# Altium PCB foc.PcbDoc
Units mm, origin at the board's own origin, x right, y up, seen from the top; angles counter-clockwise.
Board outline 68.05 x 53.25 mm, 2 copper layers (Top Layer, Bottom Layer), stack 1.671 mm thick; 34 components, 40 nets, 128 pads, 27 vias.
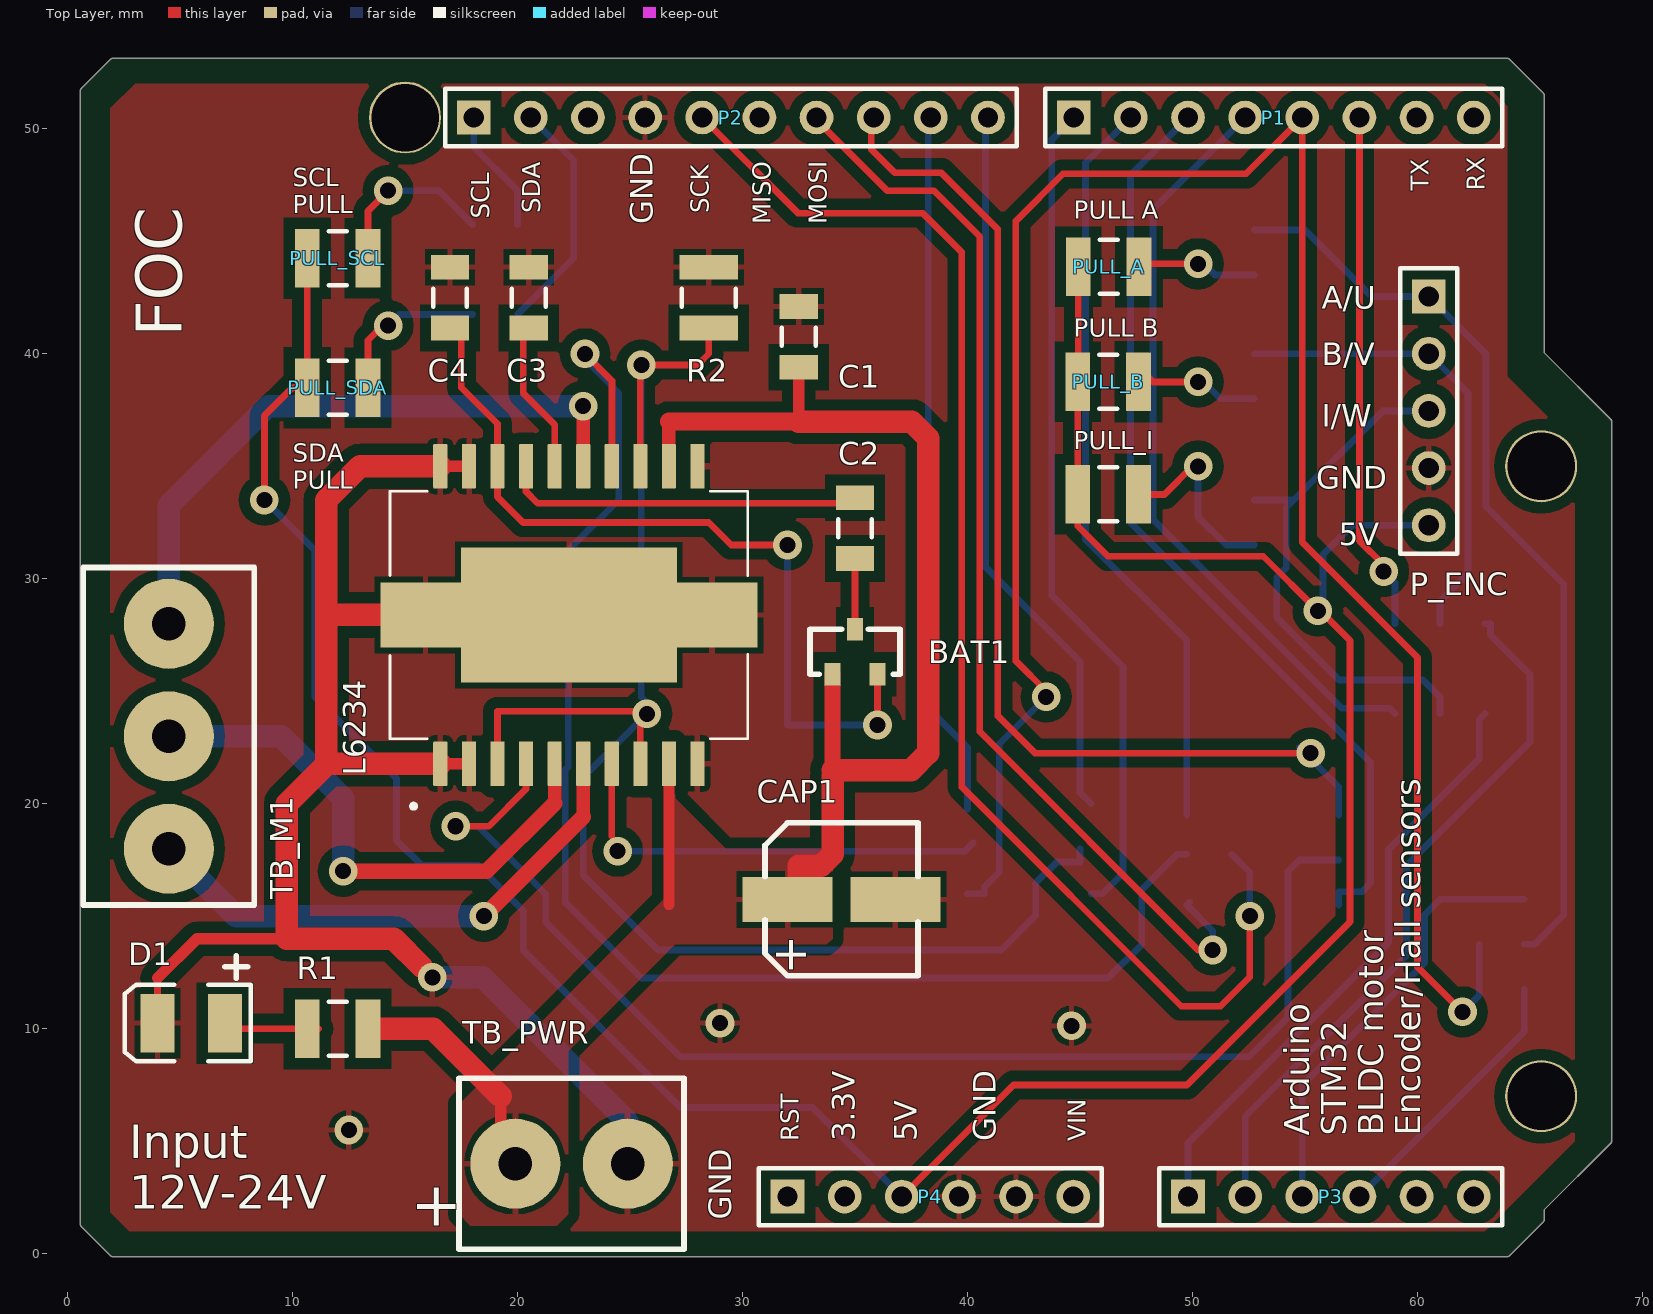
[diagram p0: Top Layer view]
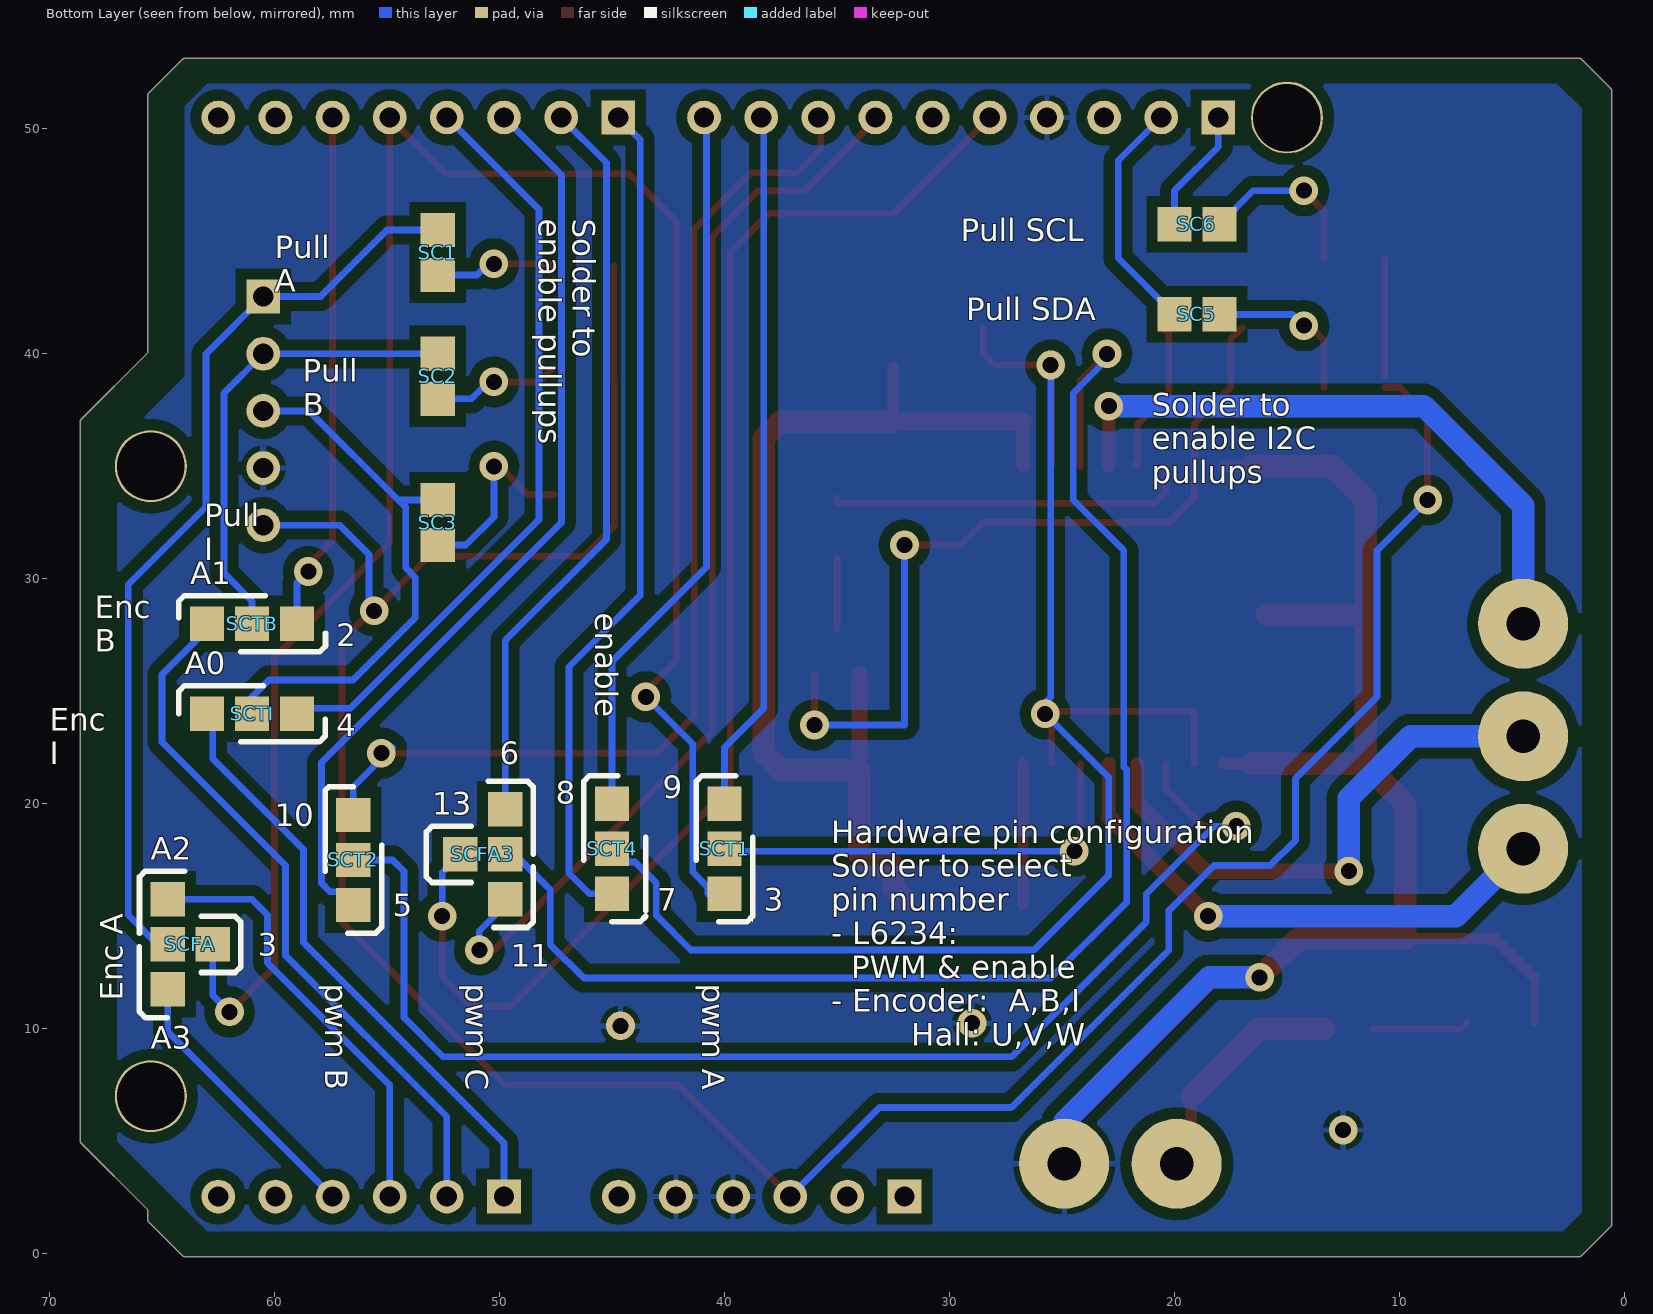
[diagram p1: Bottom Layer view, seen from below]

## Layer stack, top to bottom
Top Solder: solder mask 0.0102, Solder Resist, Dk 3.5
Top Layer: signal copper 0.0356
Dielectric 1: dielectric 1.6, FR-4, Dk 4.8
Bottom Layer: signal copper 0.0356
Bottom Solder: solder mask 0.0102, Solder Resist, Dk 3.5

## Board outline
0.785,1.035 cw(c0.875,1.125) 0.784,1.035 0.61,1.21 1.91,-0.09 ccw(c2,0) 2,-0.127 64,-0.127 ccw(c64,0) 64.09,-0.09 65.59,1.41 ccw(c65.5,1.5) 65.627,1.5 65.627,1.947 68.59,4.91 68.59,4.909 ccw(c68.5,5) 68.627,5 68.627,37 ccw(c68.5,37) 68.59,37.091 68.59,37.09 65.627,40.053 65.627,51.5 ccw(c65.5,51.5) 65.59,51.59 64.09,53.09 ccw(c64,53) 64,53.127 2,53.127 ccw(c2,53) 1.909,53.089 1.91,53.09 0.61,51.79 ccw(c0.7,51.7) 0.573,51.7 0.573,1.3 ccw(c0.7,1.3)

## Design rules (kind name [scope] priority, off if disabled: settings)
Clearance [All] p1: gap=0.5 ignorepadtopadclearanceinfootprint=FALSE except(0.2: SMDPad-SMDPad)
PolygonConnect [All] p1: connectstyle=Relief reliefconductorwidth=0.254 reliefentries=4 polygonreliefangle="90 Angle" airgapwidth=0.254
RoutingVias [All] p1: holewidth=0.711 width=1.27 viastyle="Through Hole" minholewidth=0.711 minwidth=1.27 maxholewidth=0.711 maxwidth=1.27
SolderMaskExpansion [All] p1: expansion=0.102
Width Mot_line [InNetClass('Mot')] p1: maxlimit=1 minlimit=0.5 preferedwidth=0.5
Width PWR_line [InNet('VCC')] p2: maxlimit=1 minlimit=0.5 preferedwidth=0.5
Width GND_line [InNet('GND')] p3: maxlimit=1 minlimit=0.3 preferedwidth=0.5 minimp=50.000000 maximp=50.000000 favimp=50.000000
Width [All] p4: maxlimit=0.3 minlimit=0.3 preferedwidth=0.3
30 further rules are at their usual default settings.

## Classes and differential pairs
net class Mot: NetL6234_5 NetL6234_6 NetL6234_15

## Components (designator, comment, footprint, x,y, rotation, side; value= is the part's Value field where it differs from the comment)
BAT1 "BAT54S" BAT54s 36,25.75 r180 top
C1 "Cap Semi" C1206 32.5,40.75 r90 top value=10nF
C2 "Cap Semi" C1206 35,32.25 r90 top value=10uF
C3 "Cap Semi" C1206 20.5,42.5 r90 top value=1uF
C4 "Cap Semi" C1206 17,42.5 r270 top value=220nF
CAP1 "EEH-ZA1E101XP" EEH-ZA1E101XP 37.8,19.15 r270 top
D1 "LED3" 3.5X2.8X1.9 5.5,10.25 r180 top
L6234 "L6234PD013TR" SOIC127P1420X360-21N 22.285,28.39 r90 top
P1 "Header 8" HDR1X8 44.72,50.5 r0 top locked
P2 "Header 10" HDR1X10 18.05,50.5 r0 top
P3 "Header 6" HDR1X6 49.8,2.54 r0 top locked
P4 "Header 6" HDR1X6 32,2.54 r0 top locked
P_ENC "Header 5" HDR1X5 60.5,42.54 r270 top
PULL_A "Res3" 14-1210 46.277,43.877 r0 top value=3.3k
PULL_B "Res3" 14-1210 46.25,38.75 r0 top value=3.3k
PULL_I "Res3" 14-1210 46.25,33.75 r0 top value=3.3k
PULL_SCL "Res3" 14-1210 12,44.25 r0 top value=4.7K
PULL_SDA "Res3" 14-1210 12,38.5 r0 top value=4.7K
R1 "Res3" 14-1210 12,10 r0 top value=620Ohm
R2 "Res3" 14-1210 28.5,42.5 r270 top value=4.7K
SC1 "solder_connection" solder_connection 52.75,45.5 r270 bottom
SC2 "solder_connection" solder_connection 52.75,40 r270 bottom
SC3 "solder_connection" solder_connection 52.75,33.5 r270 bottom
SC5 "solder_connection" solder_connection 20,41.75 r180 bottom
SC6 "solder_connection" solder_connection 20,45.75 r180 bottom
SCFA "solder_connection_four" solder_connection_four 64.75,13.75 r90 bottom
SCFA3 "solder_connection_four" solder_connection_four 49.75,17.75 r270 bottom
SCT1 "solder_connection_tripple" solder_connection_tripple 40,18 r270 bottom
SCT2 "solder_connection_tripple" solder_connection_tripple 56.5,17.5 r270 bottom
SCT4 "solder_connection_tripple" solder_connection_tripple 45,18 r270 bottom
SCTB "solder_connection_tripple" solder_connection_tripple 61,28 r180 bottom
SCTI "solder_connection_tripple" solder_connection_tripple 61,24 r180 bottom
TB_M1 "TB002-500-03BE" TB002-500-03BE 4.5,18 r90 top
TB_PWR "TB002-500-02BE" TB002-500-02BE 24.9,4 r180 top

## Footprints (in the part's own frame and the unit in brackets; to place one, negate y for a bottom-side part, rotate by r counter-clockwise, add the part's x,y. Pads: shape width x height; smd on the part's side, far side on the other; paste and mask are expansions set on the pad)
3.5X2.8X1.9 [mm] "SM LED; 2 C-Bend Leads; Body 3.5 x 2.8 x 1.9 mm, inc leads (LxWxH typ)"
  rect 1.5x2.6 smd: 1(-1.5,0) 2(1.5,0)
  silkscreen extent -2.65,-1.7 2.95,1.7
14-1210 [mm] "Chip Resistor, Body 3.2x2.5mm, IPC High Density"
  rect 1.1x2.6 smd: 1(-1.35,0) 2(1.35,0)
  silkscreen extent -0.4,-1.2 0.4,1.2, body extent -1.68,-1.32 1.68,1.32, height 0.9
BAT54s [mm]
  rect 0.7x1 smd: 1(2,0) 2(0,0) 3(1,-2)
  silkscreen extent -1,-2 3,0, body extent -0.46,-2.17 2.46,0.17, height 1
C1206 [mm] "Chip Capacitor, Body 3.2x1.6mm, IPC High Density"
  rect 1.1x1.7 smd: 1(-1.35,0) 2(1.35,0)
  silkscreen extent -0.4,-0.75 0.4,0.75, body extent -1.7,-0.9 1.7,0.9, height 1.3
EEH-ZA1E101XP [mm]
  rect 2x4 smd: 1(3.4,-1) 2(3.4,-5.8)
  silkscreen extent 0,-6.8 6.8,0, body extent 0.2,-7 6.8,0.3, height 7.7
HDR1X5 [mm] "Connector; Header; 5 Position"
  rect 1.5x1.5 hole 0.9: 1(0,0)
  round 1.5 hole 0.9: 2(2.54,0) 3(5.08,0) 4(7.62,0) 5(10.16,0)
  silkscreen extent -1.27,-1.27 11.43,1.27
HDR1X6 [mm] "Connector; Header; 6 Position"
  rect 1.5x1.5 hole 0.9: 1(0,0)
  round 1.5 hole 0.9: 2(2.54,0) 3(5.08,0) 4(7.62,0) 5(10.16,0) 6(12.7,0)
  silkscreen extent -1.27,-1.27 13.97,1.27
HDR1X8 [mm] "Connector; Header; 8 Position"
  rect 1.5x1.5 hole 0.9: 1(0,0)
  round 1.5 hole 0.9: 2(2.54,0) 3(5.08,0) 4(7.62,0) 5(10.16,0) 6(12.7,0) 7(15.24,0) 8(17.78,0)
  silkscreen extent -1.27,-1.27 19.05,1.27
HDR1X10 [mm] "Connector; Header; 10 Position"
  rect 1.5x1.5 hole 0.9: 1(0,0)
  round 1.5 hole 0.9: 2(2.54,0) 3(5.08,0) 4(7.62,0) 5(10.16,0) 6(12.7,0) 7(15.24,0) 8(17.78,0) 9(20.32,0) 10(22.86,0)
  silkscreen extent -1.27,-1.27 24.13,1.27
SOIC127P1420X360-21N [mm]
  rrect16% 1.99x0.63 smd: 1(-6.61,5.715) 2(-6.61,4.445) 3(-6.61,3.175) 4(-6.61,1.905) 5(-6.61,0.635) 6(-6.61,-0.635) 7(-6.61,-1.905) 8(-6.61,-3.175) 9(-6.61,-4.445) 10(-6.61,-5.715) 11(6.61,-5.715) 12(6.61,-4.445) 13(6.61,-3.175) 14(6.61,-1.905) 15(6.61,-0.635) 16(6.61,0.635) 17(6.61,1.905) 18(6.61,3.175) 19(6.61,4.445) 20(6.61,5.715)
  rect 6x9.6 smd paste-6: 21(0,0)
  rect 2.9x4 smd paste-3: 22(0,6.375) 23(0,-6.375)
  silkscreen extent -8.6,-7.95 5.5,7.95, body extent -7.25,-7.74 7.25,8.27, height 3.5
solder_connection [mil]
  rect 60x60 smd: 1(0,0) 2(78.74,0)
solder_connection_four [mil]
  rect 60x60 smd: 1(0,0) 2(78.74,0) 3(-78.74,0) 4(0,-78.74)
solder_connection_tripple [mil]
  rect 60x60 smd: 1(0,0) 2(78.74,0) 3(-78.74,0)
TB002-500-02BE [mm] "TB002-500-02BE"
  round 4 hole 1.5: 1(0,0) 2(5,0)
  silkscreen extent -2.5,-3.8 7.5,3.8, body extent -2.5,-4.4 7.5,4.6, height 13.55
TB002-500-03BE [mm] "TB002-500-03BE"
  round 4 hole 1.5: 1(0,0) 2(5,0) 3(10,0)
  silkscreen extent -2.5,-3.8 12.5,3.8, body extent -2.57,-5.2 13.17,4.6, height 13.8

## Part data
BAT1: Supplier Part Number 1=512-BAT54S, Supplier 1=Mouser
C1 C2 C3 C4: "Capacitor (Semiconductor SIM Model)", LatestRevisionDate=29-May-2009, LatestRevisionNote="IPC-7351 Footprint Added.", PackageDescription="Chip Capacitor", PackageReference=C1206, Published=8-Jun-2000, Publisher="Altium Limited"
CAP1: Supplier Part Number 1=667-EEH-ZA1E101XP, Supplier 1=Mouser
D1: "Typical BLUE SiC LED", DatasheetVersion=16-Apr-2002, LatestRevisionDate=17-Dec-2003, LatestRevisionNote="PCB Footprint replaced.", PackageDescription="SM LED; 2 C-Bend Leads; Body 3.5 x 2.8 x 1.9 mm, inc leads (LxWxH typ)", PackageReference=3.5X2.8X1.9, PackageVersion=16-Apr-2002, Published=8-Jun-2000, Publisher="Altium Limited"
L6234: "Motor Driver BiCDMOS Parallel PowerSO-20", Package="SO-20 STMicroelectronics", Digi-Key_Part_Number=497-5352-1-ND, Digi-Key_Purchase_URL=https://www.digikey.com/product-detail/en/stmicroelectronics/L6234PD013TR/497-5352-1-ND/1154483?utm_source=snapeda&utm_medium=aggregator&utm_campaign=symbol, MF=STMicroelectronics, MP=L6234PD013TR, SnapEDA_Link=https://www.snapeda.com/parts/L6234PD013TR/STMicroelectronics/view-part/75337/?ref=snap
P1: "Header, 8-Pin", LatestRevisionDate=17-Jul-2002, LatestRevisionNote="Re-released for DXP Platform.", Publisher="Altium Limited"
P2: "Header, 10-Pin", LatestRevisionDate=17-Jul-2002, LatestRevisionNote="Re-released for DXP Platform.", Publisher="Altium Limited"
P3 P4: "Header, 6-Pin", LatestRevisionDate=17-Jul-2002, LatestRevisionNote="Re-released for DXP Platform.", Publisher="Altium Limited"
P_ENC: "Header, 5-Pin", LatestRevisionDate=17-Jul-2002, LatestRevisionNote="Re-released for DXP Platform.", Publisher="Altium Limited"
PULL_A PULL_B PULL_I PULL_SCL PULL_SDA R1 R2: "Resistor", LatestRevisionDate=29-May-2009, LatestRevisionNote="IPC-7351 Footprint Added.", PackageDescription="Chip Resistor", PackageReference=J1-0603, Published=8-Jun-2000, Publisher="Altium Limited"
TB_M1: Supplier Part Number 1=490-TB002-500-03BE, Supplier 1=Mouser
TB_PWR: Supplier Part Number 1=490-TB002-500-02BE, Supplier 1=Mouser

## Free pads (board coordinates)
  round 3.2 hole 3: T1(15,50.5) T2(65.5,35) T3(65.5,7)

## Via types
v1: diameter 1.27, hole 0.711, Top Layer to Bottom Layer, 27 vias

## Nets (pads, with @x,y where several pads share a name; then routed paths per layer and width w, separated by ;. In a path a pad name is that pad's centre, name@x,y a point inside that pad or via, vN(x,y) a via of type N, cw(c..) or ccw(c..) an arc to the next point about the centre after c; other vN are vias at no path point)
+5: P4.3 P_ENC.5 PULL_A.1 PULL_B.1 PULL_I.1 PULL_SCL.1 PULL_SDA.1 | length 131
  Top Layer w0: v1@55.572,28.072 v1(55.572,28.572)
  Top Layer w0.3: v1(8.75,33.5) 8.75,37.25 10,38.5 PULL_SDA.1 ; PULL_SDA.1@10.65,39 PULL_SCL.1 ; P4.3 42.04,7.5 49.75,7.5 57,14.75 57,27.25 v1@55.625,28.625 ; PULL_A.1 44.927,38.777 PULL_B.1 PULL_I.1 44.9,32.35 46.25,31 53.145,31 v1(55.572,28.572) ; P_ENC.5@60.17,31.85 P_ENC.5@60.4,32.08
  Bottom Layer w0: v1@55.375,28.125 v1@55.375,28.625
  Bottom Layer w0.3: v1@9,33.25 11,31.25 11,24.75 14.625,21.125 14.625,18.375 15.75,17.25 18.25,17.25 20.25,15.25 20.25,13.5 27.25,6.5 33.12,6.5 P4.3 ; v1(55.572,28.572) 55.8,28.8 55.8,31.069 57.111,32.38 P_ENC.5
GND: C1.2 C3.2 C4.1 CAP1.1 D1.2 L6234.1 L6234.2 L6234.10 L6234.11 L6234.19 L6234.20 L6234.21 L6234.22 L6234.23 P2.4 P4.4 P4.5 P_ENC.4 R2.1 TB_PWR.1 | length 66.2
  Top Layer w0.3: D1.2 4,12.25 ; L6234.2@17.81,21.75 L6234.2
  Top Layer w0.5: 4,12.25 5.75,14 9.75,14 ; 11.5,21.75 11.53,21.78 ; 11.5,28.25 11.64,28.39 ; L6234.1 L6234.2 ; L6234.20 L6234.19
  Top Layer w1: 11.53,21.78 L6234.1 ; 11.64,28.39 L6234.22 ; 15.75,12.75 14.5,14 9.75,14 9.75,20 11.5,21.75 11.5,28.25 11.5,33.5 13,35 L6234.20
  Bottom Layer w1: v1(16.214,12.286) 18.464,12.286 24.9,5.85 TB_PWR.1
  other v1: 12.5,5.5 44.623,10.127 29,10.25
NetBAT1_2: BAT1.2 C4.2 L6234.18 | length 36.4
  Top Layer w0.3: C4.2 17.5,40.65 17.5,38.5 19.11,36.89 19.11,33.64 20.25,32.5 28.5,32.5 29.5,31.5 v1(32,31.5) ; v1(36,23.5) BAT1.2
  Bottom Layer w0.3: v1(32,31.5) 32,23.5 v1(36,23.5)
NetBAT1_3: BAT1.3 C2.1 | length 3.1
  Top Layer w0.3: BAT1.3 C2.1
NetC2_2: C2.2 L6234.17 | length 16.2
  Top Layer w0.3: L6234.17 20.38,33.87 20.895,33.355 35,33.355 C2.2
NetC3_1: C3.1 L6234.16 | length 7
  Top Layer w0.3: C3.1 20.25,40.9 20.25,38.25 21.65,36.85 L6234.16 L6234.16@21.75,35.1
NetD1_1: D1.1 R1.1 | length 4.3
  Top Layer w0.3: D1.1 7.25,10 R1.1@11.15,10
NetL6234_3: L6234.3 L6234.8 L6234.13 R2.2 SCT4.1 | length 70.1
  Top Layer w0.3: L6234.3 19.11,24.11 v1@25.39,24.11 ; L6234.8 v1@25.46,24.04 ; L6234.13 v1@25.46,39.21 ; v1(25.5,39.5) 28,39.5 28.5,40 R2.2
  Bottom Layer w0.3: v1(25.5,39.5) 25.5,24.75 26,24.25 v1(25.75,24) 22.92,21.17 22.92,16.83 26.25,13.5 41.5,13.5 43.028,15.028 43.028,16.472 43.969,17.412 45,17.412 SCT4.1
NetL6234_4: L6234.4 SCT2.1 | length 56.6
  Top Layer w0.3: v1(17.25,19) 18.727,19 20.38,20.653 L6234.4
  Bottom Layer w0.3: v1(17.25,19) 18.25,19 21.25,16 21.25,14.75 27.25,8.75 52.5,8.75 54.25,10.5 54.25,17 54.75,17.5 SCT2.1
NetL6234_5: L6234.5 TB_M1.2 | length 24.5
  Top Layer w0.6: 21.65,20.027 L6234.5
  Top Layer w0.7: v1(12.25,17) 18.623,17 21.65,20.027
  Bottom Layer w1: TB_M1.2 9.5,23 12.25,20.25 v1(12.25,17)
NetL6234_6: L6234.6 TB_M1.1 | length 23.9
  Top Layer w0.6: 22.92,19.42 L6234.6
  Top Layer w0.7: v1(18.5,15) 22.92,19.42
  Bottom Layer w1: TB_M1.1 7.5,15 v1(18.5,15)
NetL6234_7: L6234.7 SCT1.1 | length 19.2
  Top Layer w0.3: 24.19,18.56 L6234.7
  Bottom Layer w0.3: v1(24.454,17.894) 39.894,17.894 SCT1.1@40.25,18.25
NetL6234_14: L6234.14 SCFA3.1 | length 64.8
  Top Layer w0.3: v1@23.25,40 v1(23,40) 24.205,38.795 L6234.14@24.205,35.015 ; L6234.14@24.205,35.015 L6234.14 L6234.14@24.205,35.015
  Bottom Layer w0.3: v1(23,40) 23.25,40 23.465,39.785 23.215,39.535 24.5,38.25 24.5,33.5 22.25,31.25 22.25,21.631 22.12,21.501 22.12,15.63 25.5,12.25 46.25,12.25 47.75,13.75 47.75,16.193 49.307,17.75 SCFA3.1
NetL6234_15: L6234.15 TB_M1.3 | length 30.7
  Top Layer w0.5: TB_M1.3@4.5,27.75 TB_M1.3
  Top Layer w0.6: L6234.15 v1(22.92,37.67)
  Bottom Layer w0: TB_M1.3@4.5,27.5 TB_M1.3@4.5,29.75
  Bottom Layer w1: TB_M1.3 4.5,31.164 4.5,33.25 8.92,37.67 v1(22.92,37.67)
NetP1_1: P1.1 SCT4.2 | length 37.4
  Bottom Layer w0: SCT4.2@45.5,16 SCT4.2@45.725,15.775
  Bottom Layer w0.3: P1.1 43.75,49.53 43.75,29.25 46.912,26.088 46.912,16.912 46,16 SCT4.2@45.5,16
NetP1_2: P1.2 SCFA3.3 | length 33.7
  Bottom Layer w0.3: P1.2 45.25,48.49 45.25,31.75 49.75,27.25 SCFA3.3 SCFA3.3@49.75,19.5
NetP1_3: P1.3 SCT2.2 | length 41.7
  Bottom Layer w0.3: P1.3 47.25,47.95 47.25,32.5 57.912,21.838 57.912,16.469 57.531,16.088 56.5,16.088 SCT2.2
NetP1_4: P1.4 SCTI.2 | length 33.9
  Bottom Layer w0.3: P1.4 48.25,46.41 48.25,32.631 56.631,24.25 58.75,24.25 SCTI.2
NetP1_5: P1.5 SCFA.4 SCT1.2 | length 93
  Top Layer w0.3: v1(43.5,24.75) 43.5,25 42.15,26.35 42.15,45.9 44.25,48 52.38,48 P1.5 54.88,31.62 60,26.5 60,12.75 v1(62,10.75)
  Bottom Layer w0.3: SCT1.2 40.75,16 40.75,16.307 41.412,16.969 41.412,22.662 v1(43.5,24.75) ; v1(62,10.75) 62.75,11.5 SCFA.4
NetP1_6: P1.6 SCTB.2 | length 23.2
  Top Layer w0.3: P1.6 57.42,31.687 58.5,30.607 v1(58.5,30.322)
  Bottom Layer w0.3: v1(58.5,30.322) 59,29.822 SCTB.2
NetP2_1: P2.1 SC6.1 | length 5.6
  Bottom Layer w0.3: P2.1 18.05,49.2 20,47.25 SC6.1
NetP2_2: P2.2 SC5.1 | length 10.6
  Bottom Layer w0.3: SC5.1 22.5,44.25 22.5,48.59 P2.2
NetP2_5: P2.5 SCFA3.4 | length 60.9
  Top Layer w0.3: P2.5 32.46,46.25 38,46.25 39.75,44.5 39.75,20.75 49.5,11 51.25,11 52.546,12.296 v1(52.546,15)
  Bottom Layer w0.3: SCFA3.4 52.546,16.954 v1(52.546,15)
NetP2_7: P2.7 SCFA3.2 | length 48.6
  Top Layer w0.3: P2.7@33.18,50.5 36.43,47.25 38.5,47.25 40.55,45.2 40.55,23.2 50.25,13.5 v1(50.895,13.5)
  Bottom Layer w0.3: SCFA3.2@49.875,15.625 49.75,15.5 50.895,14.355 v1(50.895,13.5)
NetP2_8: P2.8 SCT2.3 | length 48.5
  Top Layer w0.3: P2.8@35.72,50.5 35.72,49.091 36.761,48.05 38.831,48.05 41.35,45.531 41.35,23.9 43,22.25 v1(55.25,22.25)
  Bottom Layer w0.3: v1@54.75,22.5 56.5,20.75 SCT2.3
NetP2_9: P2.9 SCT1.3 | length 31.5
  Bottom Layer w0.3: P2.9@38.26,50.5 38.26,24.24 40,22.5 SCT1.3 SCT1.3@40,19.75
NetP2_10: P2.10 SCT4.3 | length 32.4
  Bottom Layer w0.3: P2.10@40.8,50.5 40.8,30.517 45,26.317 45,20.5 SCT4.3@45.5,20
NetP3_1: P3.1 SCTI.3 | length 26.9
  Bottom Layer w0.3: P3.1 49.8,4.919 58.712,13.831 58.712,17.976 62.75,22.014 62.75,23.75 SCTI.3
NetP3_2: P3.2 SCTB.3 | length 31.7
  Bottom Layer w0.3: P3.2 52.34,6.09 59.512,13.262 59.512,17.262 65,22.75 65,25.75 63.25,27.5 63.25,28 SCTB.3
NetP3_3: P3.3 SCFA.2 | length 19.5
  Bottom Layer w0.3: P3.3 54.88,7.499 60.312,12.931 60.312,15.062 61,15.75 SCFA.2
NetP3_4: P3.4 SCFA.3 | length 12.2
  Bottom Layer w0.3: P3.4 64.75,9.87 SCFA.3
NetP_ENC_1: P_ENC.1 SC1.1 SCFA.1 | length 41.2
  Bottom Layer w0.3: SC1.1 55,45.5 57.96,42.54 P_ENC.1 63.05,39.99 63.05,33.2 66.5,29.75 66.5,15.057 65.193,13.75 SCFA.1
NetP_ENC_2: P_ENC.2 SC2.1 SCTB.1 | length 21
  Bottom Layer w0.3: SC2.1 P_ENC.2 62.25,38.25 62.25,30.25 61,29 SCTB.1
NetP_ENC_3: P_ENC.3 SC3.1 SCTI.1 | length 24.4
  Bottom Layer w0.3: SC3.1 54.5,33.5 ; P_ENC.3 58.46,37.46 54.5,33.5 ; SCTI.1 61,24.75 60.25,25.5 56.513,25.5 53.75,28.263 53.75,30.057 54.162,30.469 54.162,33.162 54.5,33.5
NetPULL_A_2: PULL_A.2 SC1.2 | length 5.1
  Top Layer w0.3: PULL_A.2 47.75,44 v1(50.25,44)
  Bottom Layer w0.3: v1@50.5,44 51,43.5 SC1.2
NetPULL_B_2: PULL_B.2 SC2.2 | length 5.4
  Top Layer w0.3: PULL_B.2@47.627,39.377 48.254,38.75 v1(50.25,38.75)
  Bottom Layer w0.3: v1@50.5,38.75 51.25,38 SC2.2
NetPULL_I_2: PULL_I.2 SC3.2 | length 8.5
  Top Layer w0.3: PULL_I.2 48.75,33.75 50,35 v1(50.25,35) v1@50.25,34.9
  Bottom Layer w0.3: v1(50.25,35) 50.25,32.75 51.5,31.5 SC3.2
NetPULL_SCL_2: PULL_SCL.2 SC6.2 | length 7.7
  Top Layer w0.3: PULL_SCL.2 13.35,46.35 v1(14.25,47.25)
  Bottom Layer w0.3: v1(14.25,47.25) 16.5,47.25 SC6.2
NetPULL_SDA_2: PULL_SDA.2 SC5.2 | length 7.5
  Top Layer w0.3: PULL_SDA.2 13.35,40.6 14,41.25 v1(14.25,41.25) v1@14.5,41.25
  Bottom Layer w0.3: v1(14.25,41.25) 14.75,41.75 SC5.2
VCC: BAT1.1 C1.1 CAP1.2 L6234.9 L6234.12 R1.2 TB_PWR.2 | length 63
  Top Layer w0.5: 19.25,7 19.25,4.65 TB_PWR.2 ; 26.73,15.52 L6234.9 ; 32.5,36.98 C1.1
  Top Layer w0.6: L6234.12 26.73,36.98
  Top Layer w0.7: 34,21.5 BAT1.1
  Top Layer w0.8: 26.73,36.98 32.5,36.98
  Top Layer w1: R1.2 16.25,10 19.25,7 ; CAP1.2 32.5,16.25 32.5,17.25 33.5,17.25 34,17.75 34,21.25 34.25,21.5 ; 32.5,36.98 37.52,36.98 38.25,36.25 38.25,22.25 37.5,21.5 34.25,21.5 ; 34,21.5 34.25,21.5
pads on no net: P1.7 P1.8 P2.3 P2.6 P3.5 P3.6 P4.1 P4.2 P4.6

## Polygon pours and split planes (outlines as drawn)
no net on Mechanical 1 (solid): 2.4,52.3
GND on Top Layer "Top Layer-GND" (solid, pour order 8): 3,52 1.909,50.909 1.909,1.841 2.75,1 63,1 67,5 67,36 64,39 64,51 63,52
VCC on Top Layer "Top Layer-VCC" (solid, pour order 0): 18.75,1.25 21.75,1.25 22.25,1.75 22.25,9 27,13.75 31,13.75 33.75,13.75 34,14 34,18 29.25,18 27,20.25 27,22.75 26.5,22.75 26.5,15.75 17.4,6.65 17.4,1.75 17.9,1.25 18,1.25
GND on Bottom Layer "Bottom Layer-GND" (solid, pour order 20): 3,52 1.909,50.909 1.909,1.841 2.75,1 63,1 67,5 67,36 64,39 64,51 63,52

## Silkscreen, mask and mechanical layers (free items; w line width, h text height)
Top Overlay:
  lines w0.254: 7,12.75 8,12.75 ; 7.5,12.25 7.5,13.25
  text "TX" at 60.5,47.25 h0.8 r90
  text "RX" at 63,47.25 h0.8 r90
  text "SCL / PULL" at 10,46.25 h0.8
  text "SDA" at 21,46.25 h0.8 r90
  text "SCK" at 28.5,46.25 h0.8 r90
  text "SCL" at 18.75,46 h0.8 r90
  text "PULL A" at 44.72,46 h0.8
  text "GND" at 26,45.75 h1 r90
  text "MISO" at 31.25,45.75 h0.8 r90
  text "MOSI" at 33.75,45.75 h0.8 r90
  text "A/U" at 55.75,42 h1
  text "FOC" at 5.75,40.75 h3.5 r90
  text "PULL B" at 44.72,40.75 h0.8
  text "B/V" at 55.75,39.5 h1
  text "I/W" at 55.75,36.75 h1
  text "SDA / PULL" at 10,34 h0.8
  text "GND" at 55.5,34 h1
  text "5V" at 56.5,31.5 h1
  text "Arduino  / STM32 / BLDC motor / Encoder/Hall sensors" at 60.13,5.25 h1.1 r90
  text "RST" at 32.5,5 h0.8 r90
  text "3.3V" at 35,5 h1 r90
  text "5V" at 37.75,5 h1 r90
  text "GND" at 41.25,5 h1 r90
  text "VIN" at 45.25,5 h0.8 r90
  text "Input / 12V-24V" at 2.75,2 h1.5
  text "GND" at 29.5,1.5 h1 r90
  text "+" at 15.25,1.25 h2
Bottom Overlay:
  lines w0: 38.75,14.75 38.75,15.25
  lines w0.254: 38.75,18.5 38.75,15.25 38.75,15 39,14.75 40.25,14.75 ; 39.5,21.25 41,21.25 41.25,21 41.25,20.75 41.25,17.5 ; 43.5,15 43.75,14.75 45,14.75 ; 43.5,15.25 43.5,18.5 ; 44.75,21.25 46,21.25 46.25,21 46.25,20.25 ; 46.25,17.5 46.25,20.75 ; 48.5,17.193 48.5,15.25 48.5,14.75 48.75,14.5 50.25,14.5 ; 48.5,17.75 48.5,20.75 48.75,21 50.5,21 ; 51.25,16.5 53,16.5 53.25,16.75 53.25,18.75 53,19 52.5,19 51.25,19 ; 55.238,18.156 55.238,14.656 55.238,14.512 55.5,14.25 56.75,14.25 ; 56.5,20.75 57.588,20.75 57.75,20.588 57.75,20.088 57.75,17 ; 57.738,27.578 57.738,27.012 58,26.75 61.5,26.75 ; 57.75,23.75 57.75,23 58,22.75 61.5,22.75 ; 60.417,29.25 64,29.25 64.262,28.988 64.262,28.262 ; 60.5,25.25 64,25.25 64.25,25 ; 63.25,12.5 61.75,12.5 61.5,12.75 61.5,13 61.5,13.5 61.5,14.75 61.75,15 63.25,15 ; 64,17 65.75,17 66,16.75 66,14.25 ; 64.25,24 64.25,25 ; 64.762,10.488 65.738,10.488 66.012,10.762 66.012,13.642 ; 64.25,25 64.25,25
  text "Solder to  / enable pullups" at 48.25,46 h1 r90
  text "Pull SCL" at 29.5,45 h1
  text "Pull  / A" at 60,42.75 h1
  text "Pull SDA" at 29.25,41.5 h1
  text "Pull / B" at 58.75,37.25 h1
  text "Solder to / enable I2C  / pullups" at 21,34.25 h1
  text "Pull / I" at 63.133,30.83 h1
  text "A1" at 63.75,29.75 h1
  text "enable" at 45.75,28.5 h1 r90
  text "2" at 57.25,27 h1
  text "Enc  / B" at 68,26.75 h1
  text "A0" at 64,25.75 h1
  text "4" at 57.25,23 h1
  text "6" at 50,21.75 h1
  text "Enc  / I" at 70,21.75 h1
  text "9" at 42.75,20.25 h1
  text "8" at 47.5,20 h1
  text "13" at 53,19.5 h1
  text "10" at 60,19 h1
  text "A2" at 65.5,17.5 h1
  text "3" at 38.25,15.25 h1
  text "7" at 43,15.25 h1
  text "5" at 54.75,15 h1
  text "3" at 60.75,13.25 h1
  text "11" at 49.5,12.75 h1
  text "pwm A" at 41,12 h1 r90
  text "pwm C" at 51.5,12 h1 r90
  text "pwm B" at 57.75,12 h1 r90
  text "Enc A" at 66.75,11.25 h1 r270
  text "Hardware pin configuration / Solder to select  / pin number / - L6234:  /   PWM & enable / - Encoder:  A,B,I /         Hall: U,V,W" at 35.25,9.25 h1
  text "A3" at 65.5,9.11 h1
Mechanical 1:
  lines w0.254: 0.7,43.5 0.75,43.5 ; 0.875,1.125 2,0 ; 2,0 64,0 65.5,1.5 65.5,2 68.5,5 68.5,37 65.5,40 65.5,51.5 64,53 2,53 0.7,51.7 0.7,1.3 2,0

## Text inside footprints (layer, text, board x,y; h text height)
CAP1: Top Overlay "+" at 31.5,14.15 h1.52 r270